# Altium PCB VelostatTest.PcbDoc
Units mm, origin at the board's own origin, x right, y up, seen from the top; angles counter-clockwise.
Board outline 96 x 85 mm, 2 copper layers (Top Layer, Bottom Layer); 22 components, 31 nets, 159 pads, 0 vias.
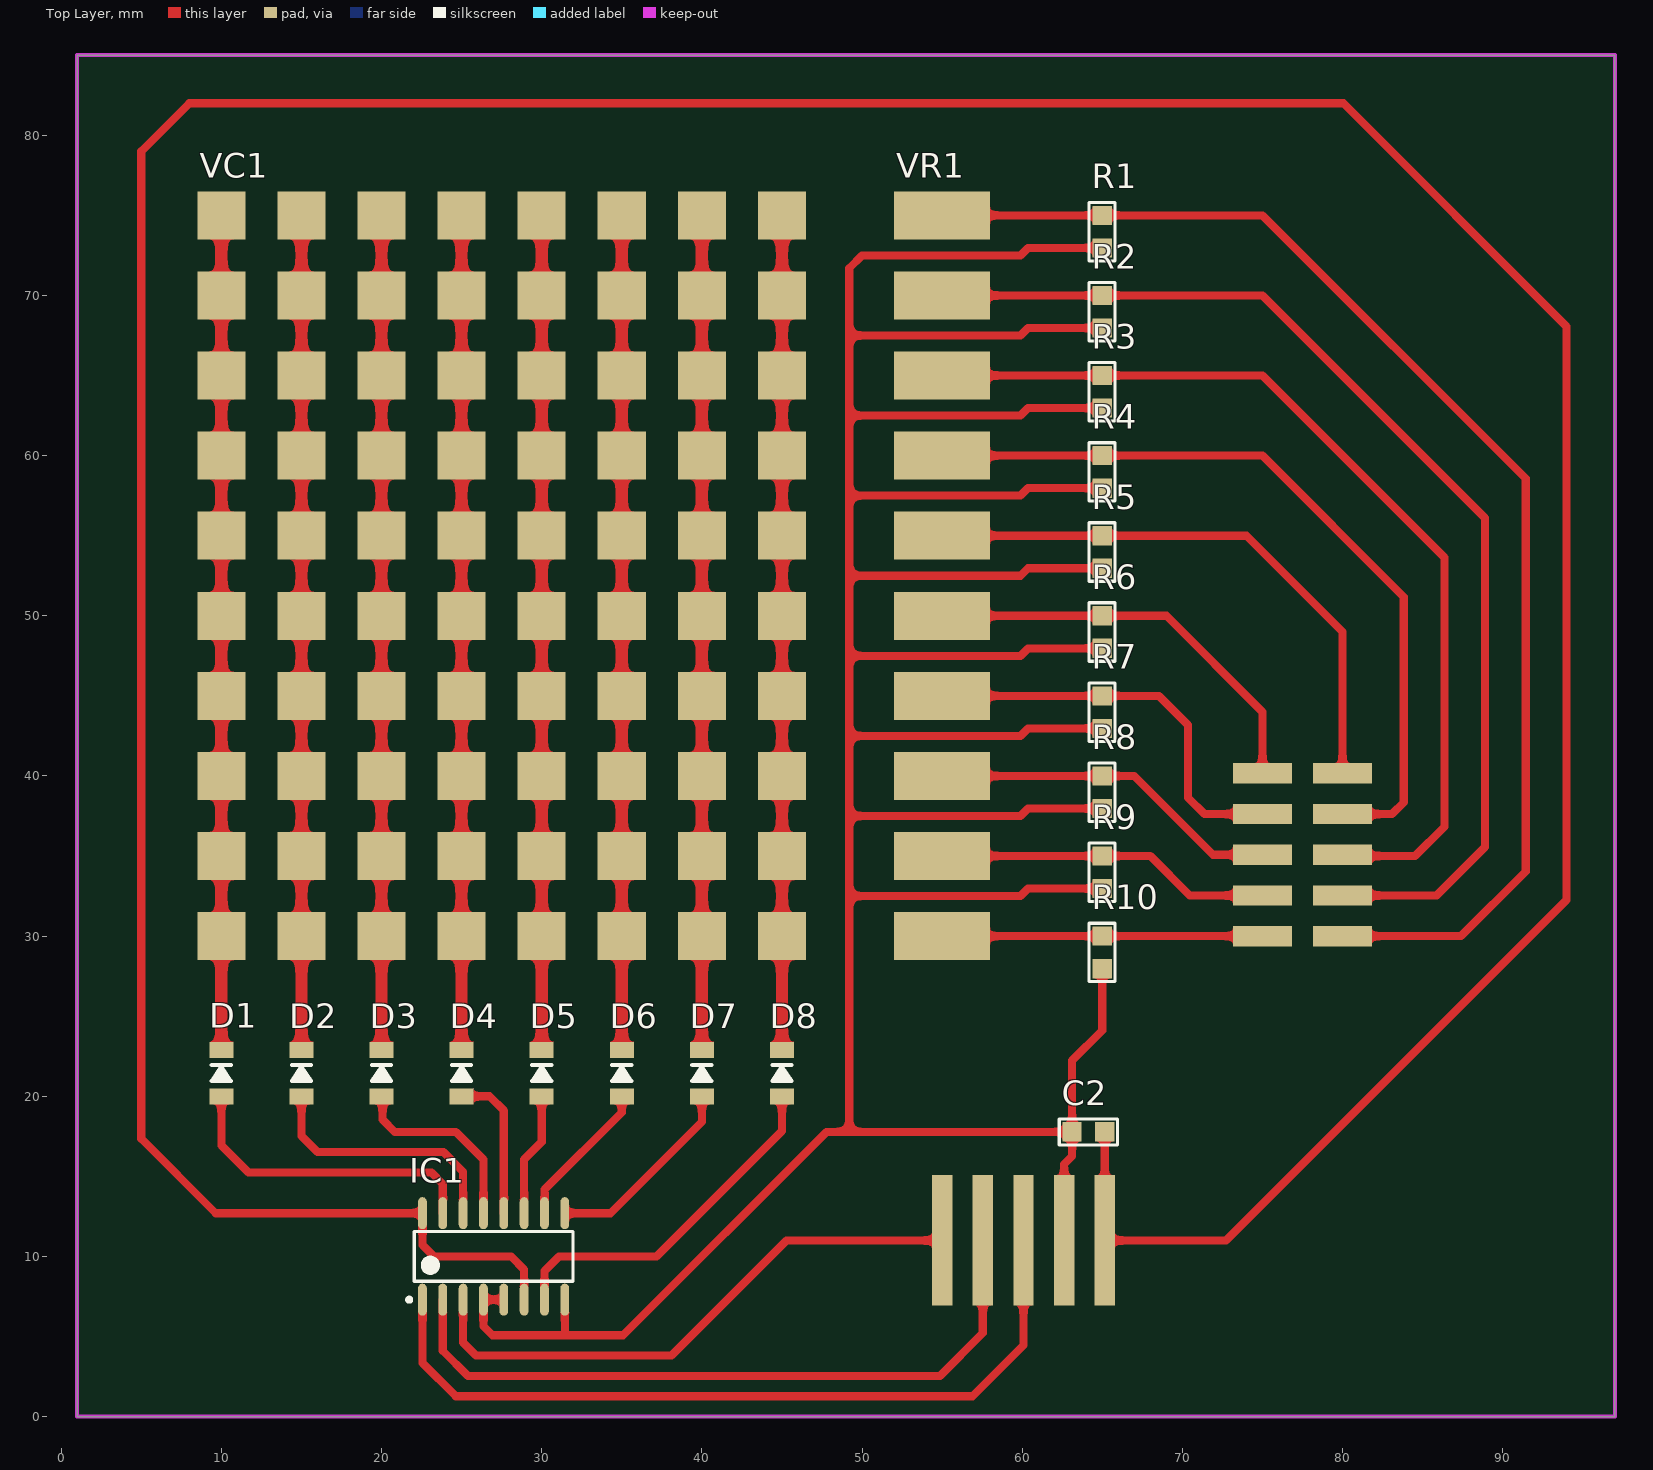
[diagram p0: Top Layer view]
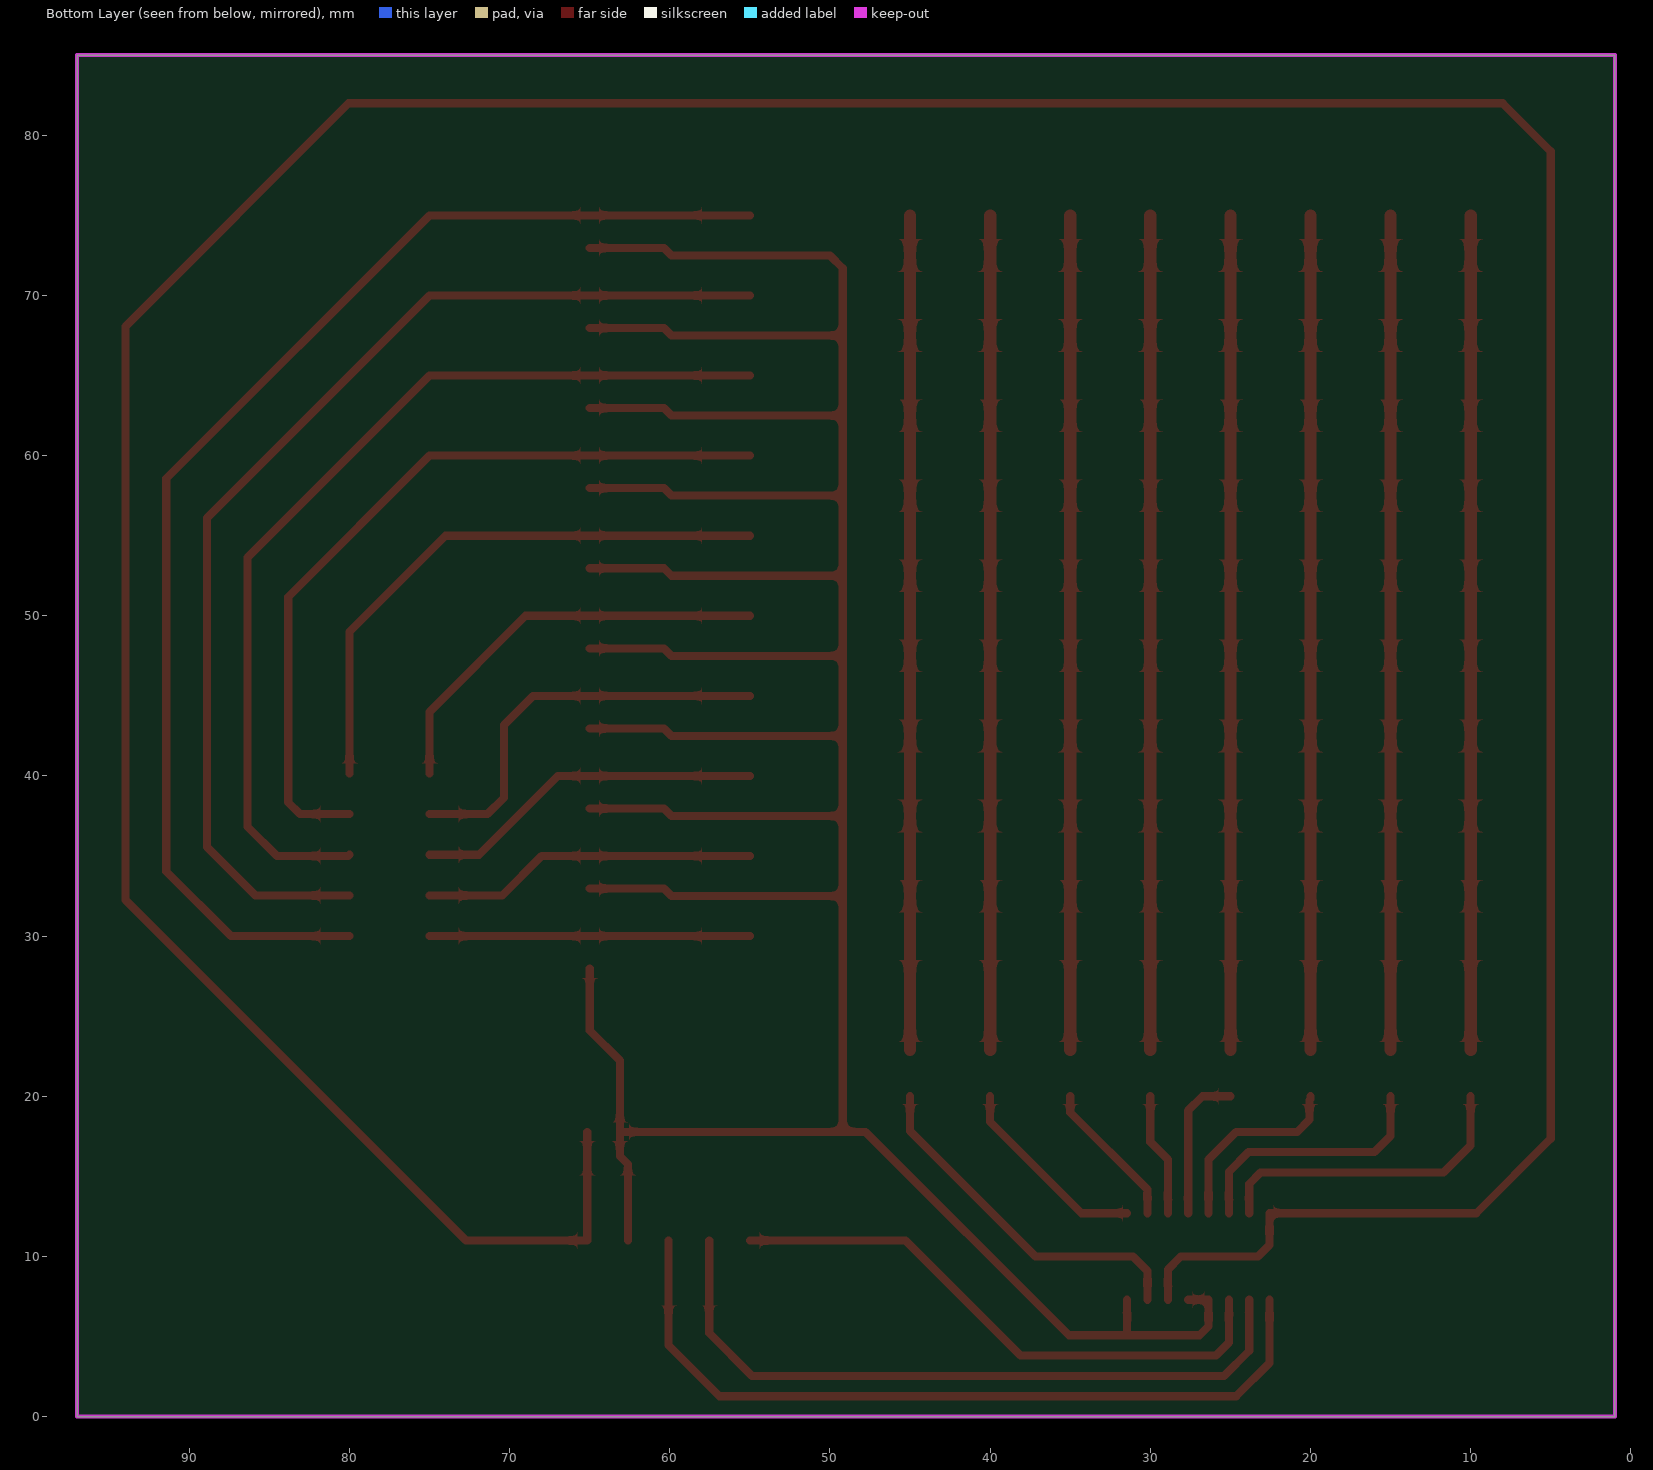
[diagram p1: Bottom Layer view, seen from below]
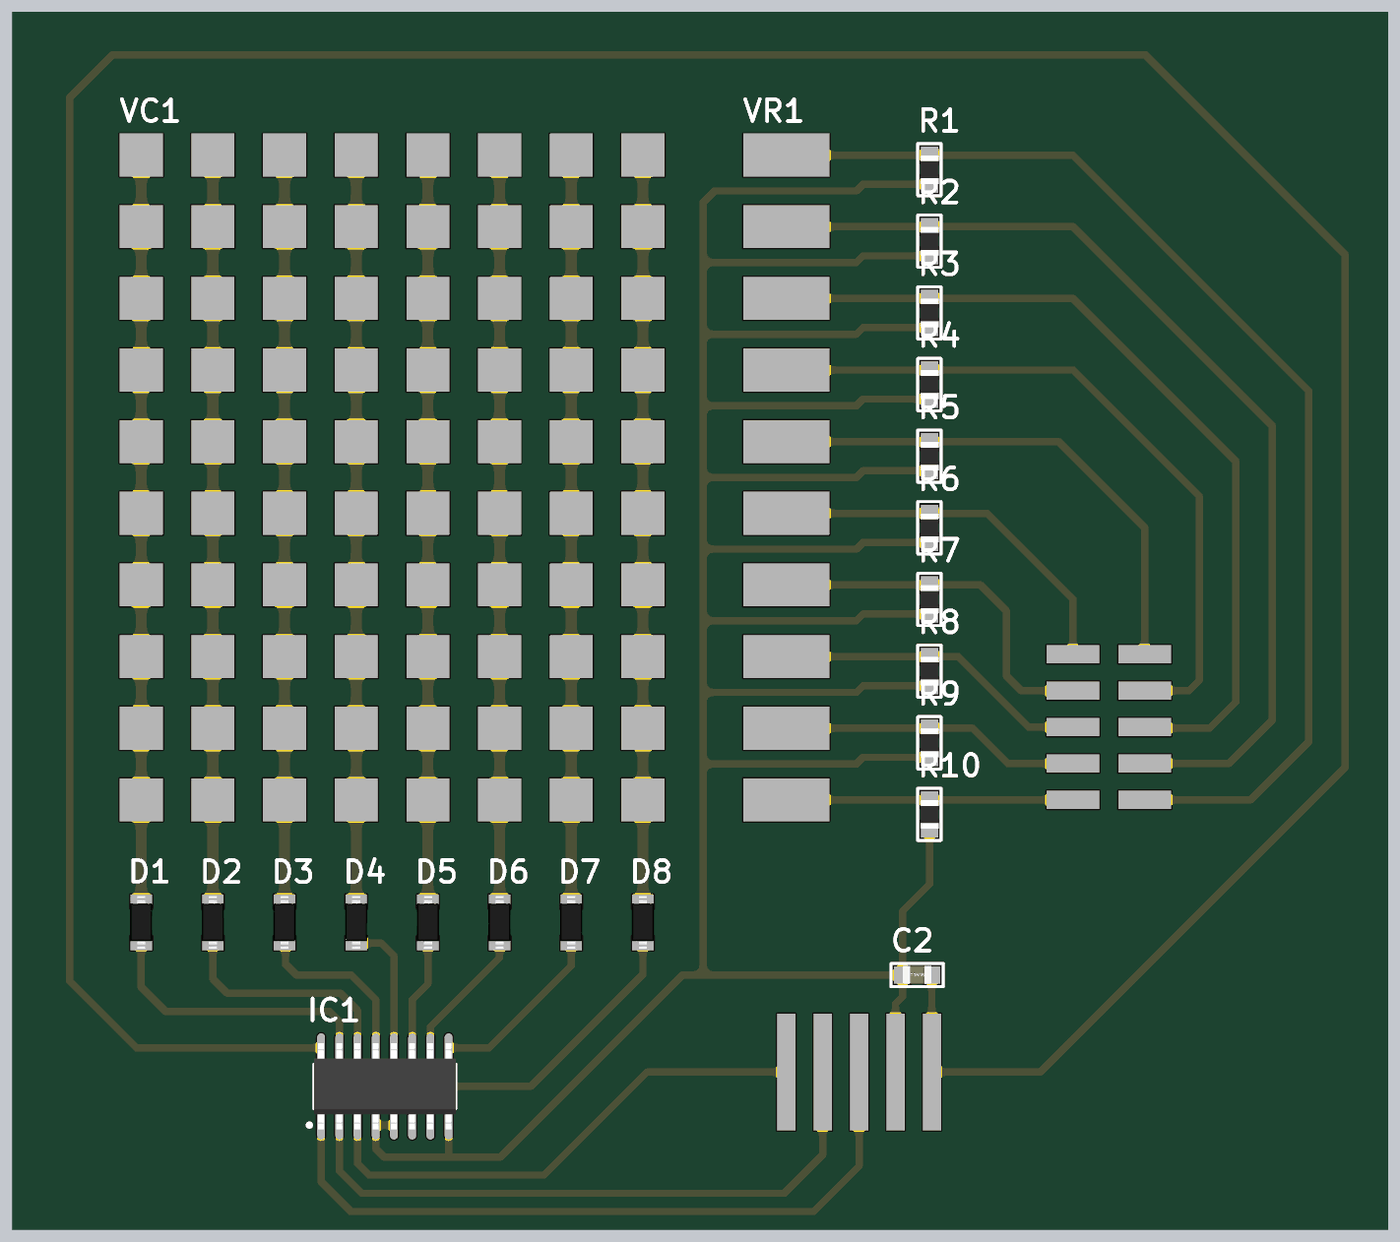
[diagram p2: 3D render of the assembled board from above, using the file's embedded part models]

## Layer stack, top to bottom
Top Solder: solder mask 0.0102, Solder Resist, Dk 3.5
Top Layer: signal copper 0.0356
Dielectric 1: dielectric 0.32, FR-4, Dk 4.8
Bottom Layer: signal copper 0.0356
Bottom Solder: solder mask 0.0102, Solder Resist, Dk 3.5

## Board outline
1,0 1,85 97,85 97,0

## Design rules (kind name [scope] priority, off if disabled: settings)
Clearance [All] p1: gap=0.508 ignorepadtopadclearanceinfootprint=FALSE
PolygonConnect [All] p1: connectstyle=Relief reliefconductorwidth=0.254 reliefentries=4 polygonreliefangle="90 Angle" airgapwidth=0.254
RoutingVias [All] p1: holewidth=0.711 width=1.27 viastyle="Through Hole" minholewidth=0.711 minwidth=1.27 maxholewidth=0.711 maxwidth=1.27
SolderMaskExpansion [All] p1: expansion=0.102 istentingtop=FALSE
Width [All] p1: maxlimit=2.54 minlimit=0.508 preferedwidth=1.016
30 further rules are at their usual default settings.

## Components (designator, comment, footprint, x,y, rotation, side; value= is the part's Value field where it differs from the comment)
C2 "Capacitor 0805" C0805-2.01-1.25-0.94 64.135,17.78 r0 top
D1 "Diode" SOD-123F 10,21.45 r90 top
D2 "Diode" SOD-123F 15,21.45 r90 top
D3 "Diode" SOD-123F 20,21.45 r90 top
D4 "Diode" SOD-123F 25,21.45 r90 top
D5 "Diode" SOD-123F 30,21.45 r90 top
D6 "Diode" SOD-123F 35,21.45 r90 top
D7 "Diode" SOD-123F 40,21.45 r90 top
D8 "Diode" SOD-123F 45,21.45 r90 top
IC1 "74LS238" SO16 27,10 r90 top
R1 "Resistor 0805" R0805 65,73.984 r270 top
R2 "Resistor 0805" R0805 65,68.984 r270 top
R3 "Resistor 0805" R0805 65,63.984 r270 top
R4 "Resistor 0805" R0805 65,58.984 r270 top
R5 "Resistor 0805" R0805 65,53.984 r270 top
R6 "Resistor 0805" R0805 65,48.984 r270 top
R7 "Resistor 0805" R0805 65,43.984 r270 top
R8 "Resistor 0805" R0805 65,38.984 r270 top
R9 "Resistor 0805" R0805 65,33.984 r270 top
R10 "Resistor 0805" R0805 65,28.984 r270 top
VC1 "VELOSTAT COL" "VELOSTAT COL" 10,75 r0 top
VR1 "VELOSTAT ROW" "VELOSTAT ROW" 55,75 r0 top

## Footprints (in the part's own frame and the unit in brackets; to place one, negate y for a bottom-side part, rotate by r counter-clockwise, add the part's x,y. Pads: shape width x height; smd on the part's side, far side on the other; paste and mask are expansions set on the pad)
C0805-2.01-1.25-0.94 [mm] "Cap 0805"
  rect 1.2x1.2 smd mask+0.1: 1(-1.016,0) 2(1.016,0)
  silkscreen extent -1.83,-0.82 1.83,0.8, body extent -1,-0.62 1.01,0.63, height 0.95
R0805 [mm] "Resistor 0805"
  rect 1.2x1.2 smd mask+0.1: 1(-1.016,0) 2(1.016,0)
  silkscreen extent -1.83,-0.82 1.83,0.8, body extent -1,-0.62 1,0.63, height 0.61
SO16 [mm] "SOIC, 16-Leads, Body 9.90x3.91mm, Pitch 1.27mm, IPC Medium Density"
  oval 2x0.55 smd: 1(-2.7,4.445) 2(-2.7,3.175) 3(-2.7,1.905) 4(-2.7,0.635) 5(-2.7,-0.635) 6(-2.7,-1.905) 7(-2.7,-3.175) 8(-2.7,-4.445) 9(2.7,-4.445) 10(2.7,-3.175) 11(2.7,-1.905) 12(2.7,-0.635) 13(2.7,0.635) 14(2.7,1.905) 15(2.7,3.175) 16(2.7,4.445)
  silkscreen extent -2.82,-4.95 1.55,5.39, body extent -3,-4.95 3,4.95, height 1.4
SOD-123F [mm]
  rect 1x1.5 smd mask+0.1: 1(-1.45,0) 2(1.45,0)
  silkscreen extent -0.5,-0.6 0.5,0.6, body extent -1.82,-0.77 1.82,0.78, height 1.1
"VELOSTAT COL" [mm]
  rect 3x3 smd: 1(0,-45) 1(0,-40) 1(0,-35) 1(0,-30) 1(0,-25) 1(0,-20) 1(0,-15) 1(0,-10) 1(0,-5) 1(0,0) 2(5,-45) 2(5,-40) 2(5,-35) 2(5,-30) 2(5,-25) 2(5,-20) 2(5,-15) 2(5,-10) 2(5,-5) 2(5,0) 3(10,-45) 3(10,-40) 3(10,-35) 3(10,-30) 3(10,-25) 3(10,-20) 3(10,-15) 3(10,-10) 3(10,-5) 3(10,0) 4(15,-45) 4(15,-40) 4(15,-35) 4(15,-30) 4(15,-25) 4(15,-20) 4(15,-15) 4(15,-10) 4(15,-5) 4(15,0) 5(20,-45) 5(20,-40) 5(20,-35) 5(20,-30) 5(20,-25) 5(20,-20) 5(20,-15) 5(20,-10) 5(20,-5) 5(20,0) 6(25,-45) 6(25,-40) 6(25,-35) 6(25,-30) 6(25,-25) 6(25,-20) 6(25,-15) 6(25,-10) 6(25,-5) 6(25,0) 7(30,-45) 7(30,-40) 7(30,-35) 7(30,-30) 7(30,-25) 7(30,-20) 7(30,-15) 7(30,-10) 7(30,-5) 7(30,0) 8(35,-45) 8(35,-40) 8(35,-35) 8(35,-30) 8(35,-25) 8(35,-20) 8(35,-15) 8(35,-10) 8(35,-5) 8(35,0)
"VELOSTAT ROW" [mm]
  rect 6x3 smd: 1(0,0) 2(0,-5) 3(0,-10) 4(0,-15) 5(0,-20) 6(0,-25) 7(0,-30) 8(0,-35) 9(0,-40) 10(0,-45)

## Part data
C2: library part "CAP 0805", "CAP CER 50V 0805", Capacitance=100nF, Case Code (Imperial)=0805, Case Code (Metric)=2012, Dielectric=X7R, Manufacturer=Panasonic, Manufacturer Part Number=ECJ-2FB1H104K, Max Operating Temperature=125°C, Min Operating Temperature=-55°C, Package Quantity=3000, Tolerance=10%, Voltage Rating=50V, Case/Package=0805, Category="Ceramic Capacitors", ComponentLink1Description=https://datasheet.ciiva.com/6267/ecj-general-6267311.pdf?src-supplier=Digi-Key, ComponentLink1URL=https://datasheet.ciiva.com/6267/ecj-general-6267311.pdf?src-supplier=Digi-Key, ComponentLink2Description=https://datasheet.ciiva.com/6267/ecj-general-6267304.pdf?src-supplier=Digi-Key, ComponentLink2URL=https://datasheet.ciiva.com/6267/ecj-general-6267304.pdf?src-supplier=Digi-Key, ComponentLink3Description=https://datasheet.ciiva.com/6267/ecj-general-6267308.pdf?src-supplier=Digi-Key, ComponentLink3URL=https://datasheet.ciiva.com/6267/ecj-general-6267308.pdf?src-supplier=Digi-Key, Depth=1.25mm, Length=0.079inch, Mount="Surface Mount", Packaging="Tape and Reel", RoHS=Yes, RoHS Compliant=Yes, Supplier 1="Arrow Electronics", Supplier Part Number 1=ECJ-2FB1H104K, Thickness=0.055inch, Voltage Rating (DC)=50V, Width=0.049inch
D1 D2 D3 D4 D5 D6 D7 D8: library part DIODE, "Default Diode", Code_JEDEC=DO-214-AB, LatestRevisionDate=17-Jul-2002, LatestRevisionNote="Re-released for DXP Platform.", PackageReference=SMC, PackageVersion=Sep-1996, Published=8-Jun-2000, Publisher="Altium Limited"
IC1: library part 74238, "3 -to- 8 Decoder - Out High", Copyright by=VanDungEvn@Gmail.com
R1 R2 R3 R4 R5 R6 R7 R8 R9 R10: library part "RES 0805", "TE CONNECTIVITY / CGS - RH73H2A100MKTN - RES, THICK FILM, 100M, 10%, 0.125W, 0805", Case Code (Imperial)=0805, Case Code (Metric)=2012, Manufacturer="TE Connectivity", Manufacturer Part Number=RH73H2A100MKTN, Max Operating Temperature=125°C, Max Power Dissipation=125mW, Min Operating Temperature=-55°C, Number of Resistors=1, Resistance=1K, Resistance Tolerance=10%, Resistor Type="Thick Film", Supplier Part Number 1=A106111CT-ND, Temperature Coefficient=100ppm/°C, Voltage Rating=100V, Case/Package=0805, Category="Chip SMD Resistors", ComponentLink1Description=https://datasheet.ciiva.com/11812/0900766b80028b3d-11812403.pdf?src-supplier=RSComponents, ComponentLink1URL=https://datasheet.ciiva.com/11812/0900766b80028b3d-11812403.pdf?src-supplier=RSComponents, ComponentLink2Description=https://datasheet.ciiva.com/7712/585397-7712010.pdf?src-supplier=Element14, ComponentLink2URL=https://datasheet.ciiva.com/7712/585397-7712010.pdf?src-supplier=Element14, ComponentLink3Description=https://datasheet.ciiva.com/7712/585397-7712011.pdf?src-supplier=Element14, ComponentLink3URL=https://datasheet.ciiva.com/7712/585397-7712011.pdf?src-supplier=Element14, ComponentLink4Description=https://datasheet.ciiva.com/12562/eng-ds-1773268-a-12562988.pdf?src-supplier=Mouser, ComponentLink4URL=https://datasheet.ciiva.com/12562/eng-ds-1773268-a-12562988.pdf?src-supplier=Mouser, ComponentLink5Description=https://datasheet.ciiva.com/16756/70064396-16756222.pdf?src-supplier=Allied+Electronics, ComponentLink5URL=https://datasheet.ciiva.com/16756/70064396-16756222.pdf?src-supplier=Allied+Electronics, Depth=1.2mm, ELV=Compliant, Height=0.4mm, Length=2mm, Mount="Surface Mount", Number of Terminations=2, Packaging="Tape and Reel", Power Rating=125mW, Pricing 1="1=1.07000, 10=0.94900, 100=0.68920 (USD)", Radiation Hardening=No, REACH SVHC=Unknown, RoHS=Yes, RoHS Compliant=Yes, Series=RH73, Stock 1=13395, Supplier 1=Digi-Key, Technology="THICK FILM", Termination=Solder, Tolerance=10%, Width=1.2mm
VC1: "8 columns to test a sensor with 8x8 dot matrix"
VR1: "10 rows to test a sensor with 8x8 dot matrix"

## Free pads (board coordinates)
  rect 1.27x8.15 smd: 2(55,11) 2(57.54,11) 2(60.08,11) 2(62.62,11) 2(65.16,11)
  rect 3.68x1.27 smd: 2(75,30) 2(75,32.54) 2(75,35.08) 2(75,37.62) 2(75,40.16) 2(80,30) 2(80,32.54) 2(80,35.08) 2(80,37.62) 2(80,40.16)

## Nets (pads, with @x,y where several pads share a name; then routed paths per layer and width w, separated by ;. In a path a pad name is that pad's centre, name@x,y a point inside that pad or via, vN(x,y) a via of type N, cw(c..) or ccw(c..) an arc to the next point about the centre after c; other vN are vias at no path point)
3V3: C2.2 IC1.6 IC1.16 pad.2@65.16,11 | length 268.2
  Top Layer w0.508: IC1.6 28.905,9.195 28.1,10 23.274,10 22.555,10.719 IC1.16 9.652,12.7 5,17.352 5,79 8,82 80.052,82 93.98,68.072 93.98,32.258 72.722,11 65.16,11 65.156,11.004 65.156,17.775 C2.2
GND: C2.1 IC1.4 IC1.5 IC1.8 pad.2@62.62,11 R1.2 R2.2 R3.2 R4.2 R5.2 R6.2 R7.2 R8.2 R9.2 R10.2 | length 263.6
  Top Layer w0.508: IC1.5 IC1.4 26.365,5.639 26.924,5.08 31.496,5.08 ; IC1.8 31.445,5.131 31.496,5.08 ; 49.2,32.5 59.893,32.5 60.361,32.968 R9.2 ; 49.2,37.5 59.893,37.5 60.361,37.968 R8.2 ; 49.2,42.5 59.893,42.5 60.361,42.968 R7.2 ; 49.2,47.5 59.893,47.5 60.361,47.968 R6.2 ; 49.2,52.5 59.893,52.5 60.361,52.968 R5.2 ; 49.2,57.5 59.893,57.5 60.361,57.968 R4.2 ; 49.2,62.5 59.893,62.5 60.361,62.968 R3.2 ; pad.2@62.62,11 62.62,15.757 63.119,16.256 C2.1 ; R10.2 65,24.106 63.119,22.225 C2.1 ; R2.2 60.361,67.968 59.893,67.5 49.2,67.5 ; R1.2 60.361,72.968 59.893,72.5 50,72.5 49.2,71.7 49.2,67.5 ; 31.496,5.08 35.08,5.08 47.78,17.78 49.2,17.78 ; 49.2,17.78 49.2,67.5 ; 49.2,17.78 C2.1
NetD1_1: D1.1 IC1.15 | length 19.7
  Top Layer w0.508: D1.1 10,16.924 11.684,15.24 23.114,15.24 23.825,14.529 IC1.15
NetD2_1: D2.1 IC1.14 | length 16.1
  Top Layer w0.508: D2.1 15,17.512 16.002,16.51 23.876,16.51 25.095,15.291 IC1.14
NetD3_1: D3.1 IC1.13 | length 12.2
  Top Layer w0.508: D3.1 20,19.82 20.066,19.754 20.066,18.542 20.828,17.78 24.638,17.78 26.365,16.053 IC1.13
NetD4_1: D4.1 IC1.12 | length 9.4
  Top Layer w0.508: D4.1 26.736,20 27.635,19.101 IC1.12
NetD5_1: D5.1 IC1.11 | length 7.8
  Top Layer w0.508: IC1.11 28.905,16.048 30,17.143 D5.1
NetD6_1: D6.1 IC1.10 | length 9.3
  Top Layer w0.508: IC1.10 30.183,12.708 30.183,14.181 35,18.998 D6.1
NetD7_1: D7.1 IC1.9 | length 12.5
  Top Layer w0.508: IC1.9 34.29,12.7 40,18.41 D7.1
NetD8_1: D8.1 IC1.7 | length 22.4
  Top Layer w0.508: IC1.7 30.175,9.093 31.082,10 37.178,10 45,17.822 D8.1
NetIC1_1: IC1.1 pad.2@60.08,11 | length 50.2
  Top Layer w0.508: IC1.1 22.555,3.353 24.638,1.27 56.896,1.27 60.08,4.454 pad.2@60.08,11
NetIC1_2: IC1.2 pad.2@57.54,11 | length 44.4
  Top Layer w0.508: IC1.2 23.825,4.115 25.4,2.54 54.864,2.54 57.54,5.216 pad.2@57.54,11
NetIC1_3: IC1.3 pad.2@55,11 | length 35.9
  Top Layer w0.508: IC1.3 25.095,4.623 25.908,3.81 38.1,3.81 45.29,11 pad.2@55,11
ROW1-A0: pad.2@80,30 R1.1 VR1.1 | length 80.9
  Top Layer w0.508: VR1.1 R1.1 75,75 91.44,58.56 91.44,34.036 87.404,30 pad.2@80,30
ROW2-A1: pad.2@80,32.54 R2.1 VR1.2 | length 70.3
  Top Layer w0.508: VR1.2 R2.1 75,70 88.9,56.1 88.9,35.56 85.88,32.54 pad.2@80,32.54
ROW3-A2: pad.2@80,35.08 R3.1 VR1.3 | length 60
  Top Layer w0.508: VR1.3 R3.1 75,65 86.36,53.64 86.36,36.83 84.53,35 80.08,35 pad.2@80,35.08
ROW4-A3: pad.2@80,37.62 R4.1 VR1.4 | length 49.4
  Top Layer w0.508: VR1.4 R4.1 75,60 83.82,51.18 83.82,38.354 83.086,37.62 pad.2@80,37.62
ROW5-A4: pad.2@80,40.16 R5.1 VR1.5 | length 36.3
  Top Layer w0.508: VR1.5 R5.1 74,55 80,49 pad.2@80,40.16
ROW6-A5: pad.2@75,40.16 R6.1 VR1.6 | length 26.3
  Top Layer w0.508: VR1.6 R6.1 69,50 75,44 pad.2@75,40.16
ROW7-A6: pad.2@75,37.62 R7.1 VR1.7 | length 25.7
  Top Layer w0.508: VR1.7 R7.1 68.538,45 70.358,43.18 70.358,38.642 71.38,37.62 pad.2@75,37.62
ROW8-A7: pad.2@75,35.08 R8.1 VR1.8 | length 22
  Top Layer w0.508: VR1.8 R8.1 67,40 71.92,35.08 pad.2@75,35.08
ROW9-B0: pad.2@75,32.54 R9.1 VR1.9 | length 21
  Top Layer w0.508: VR1.9 R9.1 68,35 70.46,32.54 pad.2@75,32.54
ROW10-B1: pad.2@75,30 R10.1 VR1.10 | length 20
  Top Layer w0.508: VR1.10 R10.1 pad.2@75,30
Y0-COL1: D1.2 VC1.1 | length 52.1
  Top Layer w0.762: D1.2 10,30 10,35 10,40 10,45 10,50 10,55 10,60 10,65 10,70 VC1.1@10,75
Y1-COL2: D2.2 VC1.2 | length 52.1
  Top Layer w0.762: D2.2 15,30 15,35 15,40 15,45 15,50 15,55 15,60 15,65 15,70 VC1.2@15,75
Y2\-COL3: D3.2 VC1.3 | length 52.1
  Top Layer w0.762: D3.2 VC1.3@20,75
Y3-COL4: D4.2 VC1.4 | length 52.1
  Top Layer w0.762: D4.2 25,30 25,35 25,40 25,45 25,50 25,55 25,60 25,65 25,70 VC1.4@25,75
Y4-COL5: D5.2 VC1.5 | length 52.1
  Top Layer w0.762: D5.2 30,30 30,35 30,40 30,45 30,50 30,55 30,60 30,65 30,70 VC1.5@30,75
Y5-COL6: D6.2 VC1.6 | length 52.1
  Top Layer w0.762: D6.2 VC1.6@35,75
Y6-COL7: D7.2 VC1.7 | length 52.1
  Top Layer w0.762: D7.2 VC1.7@40,75
Y7-COL8: D8.2 VC1.8 | length 52.1
  Top Layer w0.762: D8.2 VC1.8@45,75

## Keep-outs
Keep-Out Layer:
  the board outline again, w0.254